# Altium PCB an205x_evb.PcbDoc
Units mil, origin at the board's own origin, x right, y up, seen from the top; angles counter-clockwise.
Board outline 1574.8 x 1968.5 mil, 2 copper layers (Top Layer, Bottom Layer), stack 61.8 mil thick; 5 components, 3 nets, 13 pads, 24 vias.
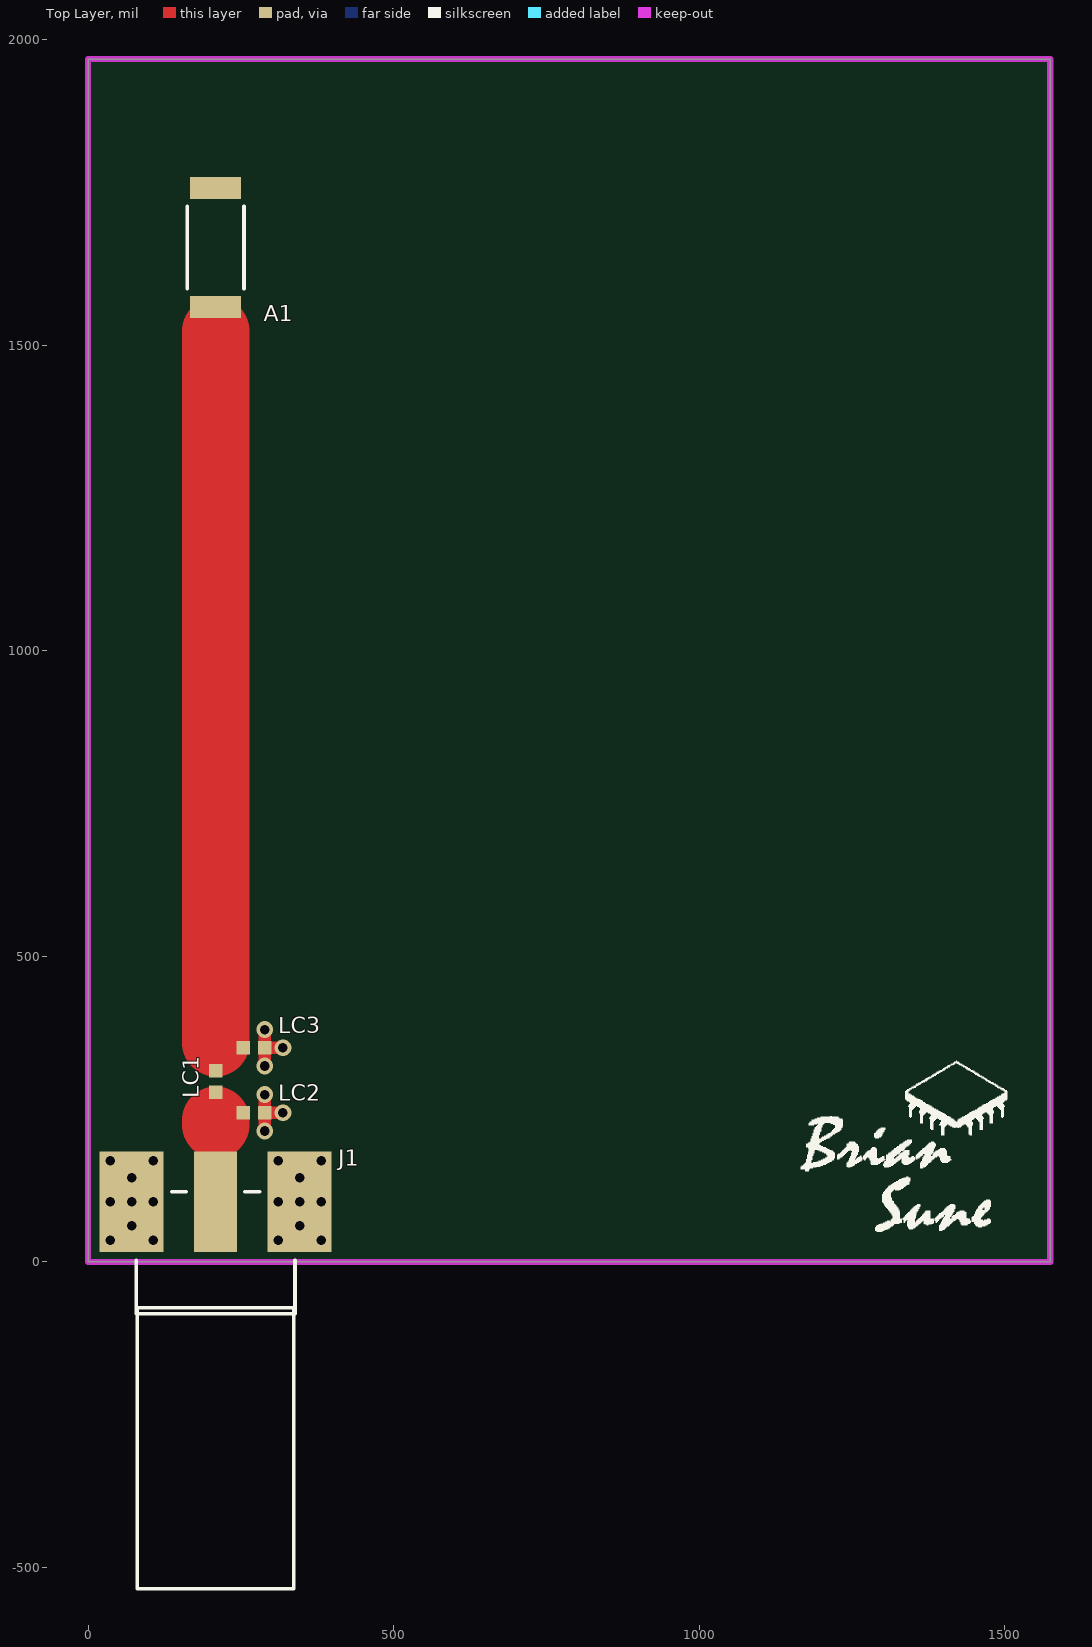
[diagram p0: Top Layer view]
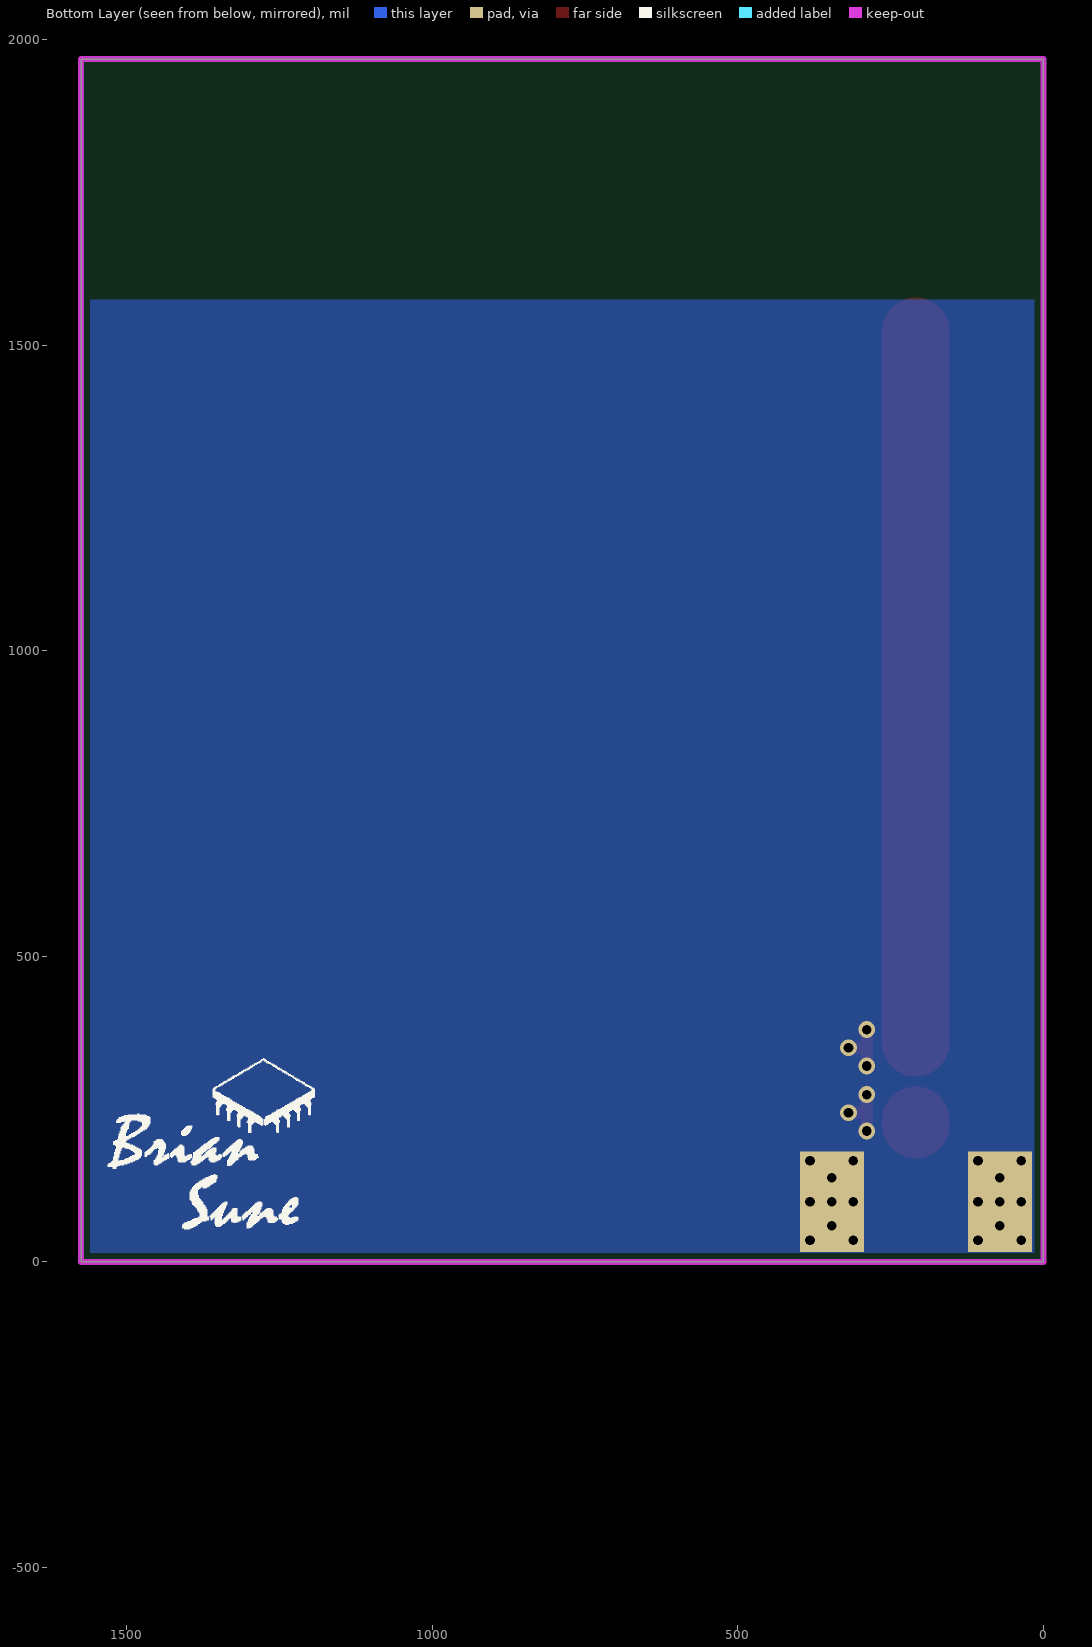
[diagram p1: Bottom Layer view, seen from below]
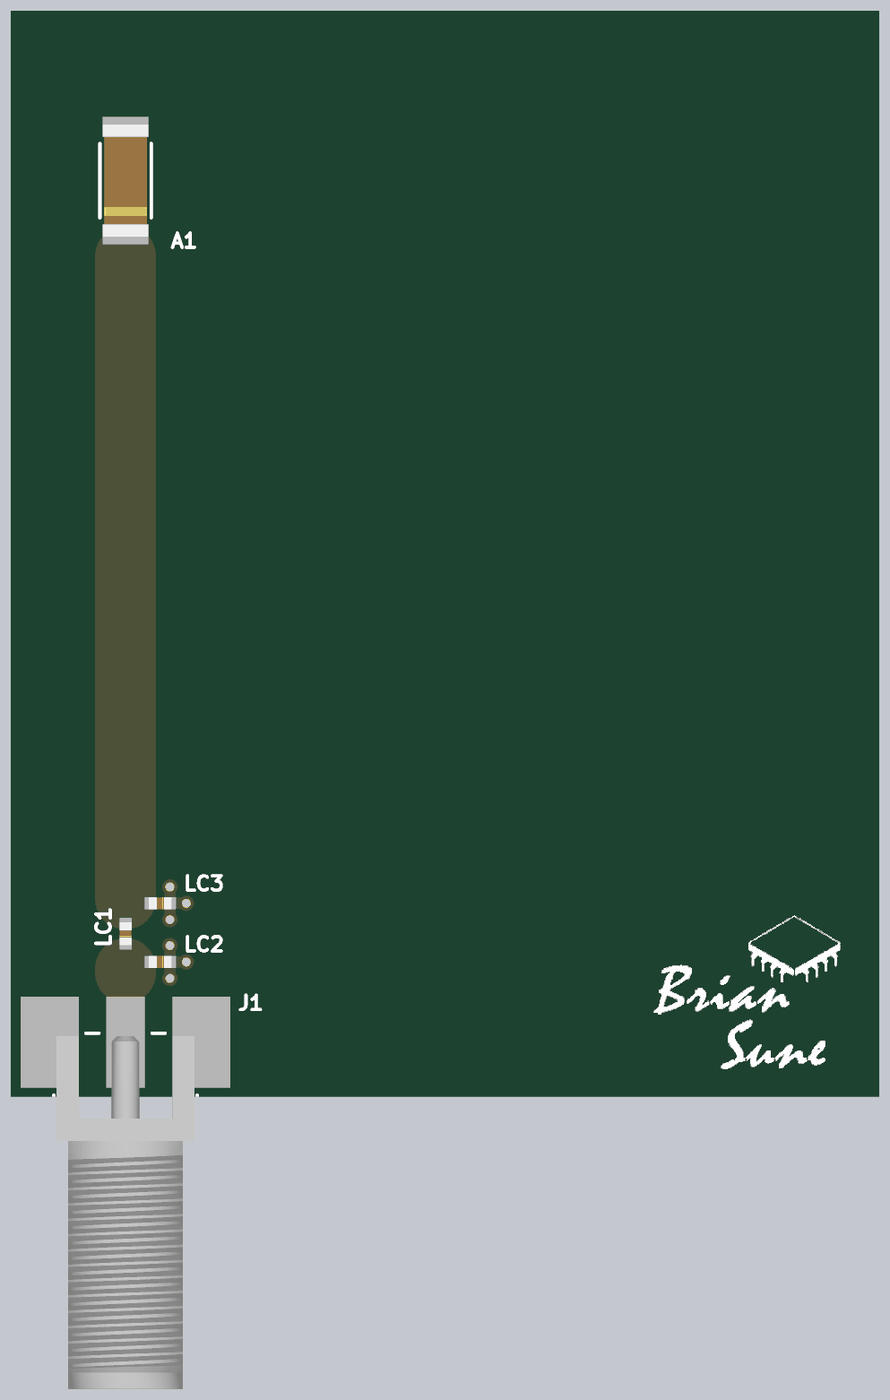
[diagram p2: 3D render of the assembled board from above, using the file's embedded part models]

## Layer stack, top to bottom
Top Solder: solder mask 0.4, Solder Resist, Dk 3.5
Top Layer: signal copper 1.4
Dielectric 1: core 59, Core-043, Dk 4.3
Bottom Layer: signal copper 1.4
Bottom Solder: solder mask 0.4, Solder Resist, Dk 3.5

## Board outline
0,0 1574.8,0 1574.8,1968.5 0,1968.5

## Design rules (kind name [scope] priority, off if disabled: settings)
Clearance [All] p1: gap=10 ignorepadtopadclearanceinfootprint=FALSE except(0: Arc-Hole Track-Hole SMDPad-Hole THPad-Hole Via-Hole Fill-Hole Poly-Hole Region-Hole Text-Hole)
MinimumSolderMaskSliver [All] p1: minsoldermaskwidth=6
PlaneConnect [All] p1: planeconnectstyle=Direct reliefexpansion=20 reliefentries=4 reliefconductorwidth=10 reliefairgap=10
PolygonConnect [All] p1: thpad.connectstyle=Relief thpad.reliefconductorwidth=10 thpad.reliefentries=4 thpad.polygonreliefangle="90 Angle" thpad.airgapwidth=10 smdpad.connectstyle=Relief smdpad.reliefconductorwidth=10 smdpad.reliefentries=4 smdpad.polygonreliefangle="90 Angle" smdpad.airgapwidth=10 via.connectstyle=Direct via.reliefconductorwidth=10 via.reliefentries=4 via.polygonreliefangle="90 Angle" via.airgapwidth=10
RoutingVias [All] p1: holewidth=15.75 width=27.56 viastyle="Through Hole" minholewidth=11.81 minwidth=11.81 maxholewidth=55.12 maxwidth=59.06
SilkToSilkClearance [All] p1: silktosilkclearance=6
SilkToSolderMaskClearance [IsPad] p1: minsilkscreentomaskgap=0 clearancetoexposedcopper=TRUE
SolderMaskExpansion [All] p1: expansion=0
Width [All] p1: maxlimit=200 minlimit=10 preferedwidth=10 bottomlayer_maxwidth=150 minimp=50.000000 maximp=50.000000 favimp=50.000000
26 further rules are at their usual default settings.

## Components (designator, comment, footprint, x,y, rotation, side; value= is the part's Value field where it differs from the comment)
A1 "AN2051-245" ANT_AN2051-245_RSN 208.66,1660.49 r90 top
J1 "732512120" CONN-732513152_MOL 208.66,14.93 r180 top
LC1 "TBD" CAP_CC0402_YAG 208.66,295.28 r90 top
LC2 "TBD" CAP_CC0402_YAG 271.65,244.09 r180 top
LC3 "TBD" CAP_CC0402_YAG 271.65,350.39 r180 top

## Footprints (in the part's own frame and the unit in brackets; to place one, negate y for a bottom-side part, rotate by r counter-clockwise, add the part's x,y. Pads: shape width x height; smd on the part's side, far side on the other; paste and mask are expansions set on the pad)
ANT_AN2051-245_RSN [mil]
  rect 36x83 smd paste+0 mask+0: 1(-97.5,0) 2(97.5,0)
  silkscreen extent -67,-47 67,47, body extent -101,-41 101,41, height 50
CAP_CC0402_YAG [mil]
  rect 22x22 smd: 1(-17.5,0) 2(17.5,0)
  body extent -21,-11 21,11, height 22
CONN-732513152_MOL [mil]
  rect 70x165 smd paste+0 mask+0: 1(0,-83.5)
  rect 105x165 smd paste+0 mask+0: 2(-137.5,-83.5) 3(137.5,-83.5)
  rect 105x165 smd far side paste+0 mask+0: 2(-137.5,-83.5) 3(137.5,-83.5)
  silkscreen extent -130,-100 130,550, body extent -125,-95 125,545, height 160

## Part data
A1: "No Description Available", Mfr_Name=RainSun, Copyright="Copyright (C) 2022 Ultra Librarian. All rights reserved.", Manufacturer_Part_Number=AN2051-245
J1: "No Description Available", Mfr_Name="Molex Connector Corporation", Copyright="Copyright (C) 2022 Ultra Librarian. All rights reserved.", Manufacturer_Part_Number=732512120, RefDes=RefDes, Type=DEV
LC1 LC2 LC3: library part CC0402MRX5R6BB106, Mfr_Name=Yageo, Copyright="Copyright (C) 2022 Ultra Librarian. All rights reserved.", Manufacturer_Part_Number=CC0402MRX5R6BB106, RefDes=RefDes, Type=DEV

## Via types
v1: diameter 27.56, hole 15.75, Top Layer to Bottom Layer, tented both sides, 24 vias

## Nets (pads, with @x,y where several pads share a name; then routed paths per layer and width w, separated by ;. In a path a pad name is that pad's centre, name@x,y a point inside that pad or via, vN(x,y) a via of type N, cw(c..) or ccw(c..) an arc to the next point about the centre after c; other vN are vias at no path point)
GND: J1.2 J1.3 LC2.1 LC3.1 | length 178.5
  Top Layer w20: v1(289.15,214.35) LC2.1 ; v1(289.15,273.84) LC2.1 ; v1(289.15,320.65) LC3.1 ; v1(289.15,380.14) LC3.1 ; v1(318.9,244.09) LC2.1 ; v1(318.9,350.39) LC3.1
  other v1: 36.02,35.43 106.89,35.43 311.02,35.43 381.89,35.43 71.16,59.06 346.16,59.06 36.02,98.43 71.16,98.43 106.89,98.43 311.02,98.43 346.16,98.43 381.89,98.43 71.16,137.8 346.16,137.8 36.02,165.35 106.89,165.35 311.02,165.35 381.89,165.35
NetA1_1: A1.1 LC1.2 LC3.2 | length 1165.4
  Top Layer w110.24: 208.66,358.27 208.66,1523.62
NetJ1_1: J1.1 LC1.1 LC2.2 | length 7.9
  Top Layer w110.24: 208.66,224.41 208.66,232.28
pads on no net: A1.2

## Polygon pours and split planes (outlines as drawn)
GND on Bottom Layer "GND_B1" (solid, remove dead copper, pour order 0): 1574.8,0 0,0 0,1574.8 1574.8,1574.8

## Keep-outs
Keep-Out Layer:
  the board outline again, w10

## Silkscreen, mask and mechanical layers (free items; w line width, h text height)
Top Overlay:
  drawing of 11 lines, arcs and shapes, not listed
Bottom Overlay:
  drawing of 11 lines, arcs and shapes, not listed